# Altium PCB electrodes_interface_pcb.PcbDoc (part 3 of 4)
Units mm, origin at the board's own origin, x right, y up, seen from the top; angles counter-clockwise.
Board outline 433.27 x 43.31 mm, 4 copper layers (Top Layer, Signal Layer 1, Signal Layer 2, Bottom Layer), stack 1.308 mm thick; 42 components, 52 nets, 166 pads, 143 vias.
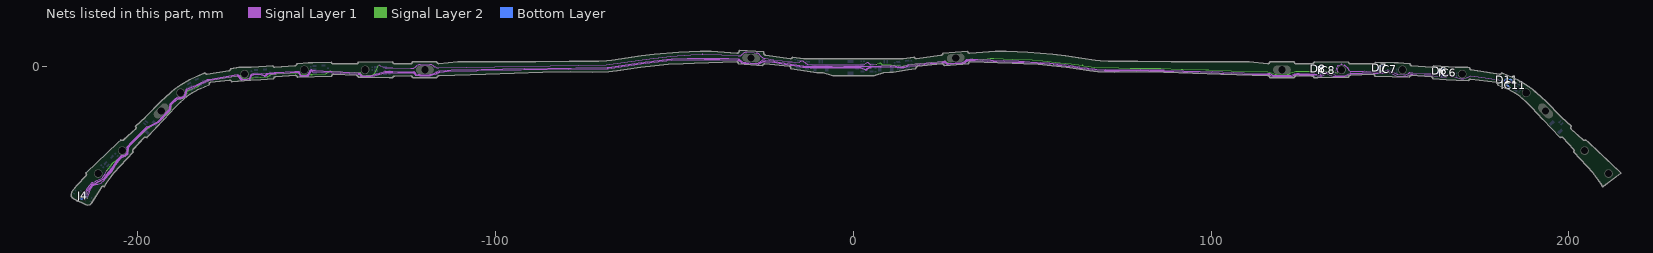
[diagram p5: the nets of this part, all layers, seen from the top]

## Via types
v1: diameter 0.4, hole 0.2, Top Layer to Bottom Layer, tented both sides, 143 vias

## Nets (pads, with @x,y where several pads share a name; then routed paths per layer and width w, separated by ;. In a path a pad name is that pad's centre, name@x,y a point inside that pad or via, vN(x,y) a via of type N, cw(c..) or ccw(c..) an arc to the next point about the centre after c; other vN are vias at no path point) (continued)
ADC_TR1: D11.2 IC11.4 IC11.5 J4.8 | length 432.3
  Signal Layer 1 w0.075: -122.272,0.134 -122.009,0.343 cw(c-121.098,-0.801) -121.098,0.661 -118.498,0.661 cw(c-118.498,-1.083) -117.208,0.09 cw(c-118.498,-1.083) -117.207,0.089 -117.206,0.088 -117.184,0.065 -117.152,0.065 ccw(c-117.152,0.14) -117.151,0.065 -116.955,0.072
  Signal Layer 1 w0.1: v1(-215.755,-35.899) -215.582,-35.58 -215.546,-35.544 -215.362,-35.42 -214.895,-34.953 -214.512,-34.455 -213.974,-33.75 -212.839,-32.286 -212.65,-32.232 cw(c-212.486,-32.809) -212.62,-32.224 -212.164,-32.119 ccw(c-212.187,-32.021) -212.161,-32.118 ; -212.171,-32.124 -212.161,-32.118 ; -212.115,-32.091 cw(c-212.187,-32.021) -212.12,-32.096 ; v1(-208.675,-29.043) -209.215,-29.811 -209.817,-30.859 -209.9,-30.909 cw(c-209.991,-30.759) -209.91,-30.915 -211.386,-31.704 -212.12,-32.096 ; v1(-132.683,0.62) -132.22,0.411 cw(c-132.364,0.092) -132.208,0.406 -130.827,-0.279 ccw(c-130.782,-0.189) -130.797,-0.288 -130.79,-0.289 ; -130.789,-0.289 -130.788,-0.289 -130.78,-0.289 -130.019,-0.28 -129.134,-0.283 -128.726,-0.285 -123.675,-0.305 -123.381,-0.306 -123.3,-0.306 -122.903,-0.306 -122.313,0.092 -122.272,0.134 ; -116.946,0.058 -116.489,-0.207 -116.461,-0.207 -116.4,-0.207 -115.932,-0.206 -69.113,0.64 -69.044,0.642 -55.904,2.435 -54.505,2.625 -54.427,2.635 -51.029,3.027 -45.461,3.418 -42.221,3.528 cw(c-42.189,2.604) -42.168,3.529 -36.751,3.41 -32.208,3.167 -32.052,3.158 -31.717,3.14 -31.595,3.139 ccw(c-31.595,3.239) -31.523,3.169 -30.886,3.729 cw(c-29.896,2.602) -29.778,4.097 -27.677,3.932 -27.186,3.893 cw(c-27.304,2.398) -25.935,3.012 ccw(c-25.844,3.052) -25.906,2.974 ; -25.906,2.974 -25.402,2.572 ; -25.406,2.577 ccw(c-25.336,2.649) -25.354,2.55 -25.283,2.537 -24.997,2.485 -24.795,2.448 -24.704,2.435 -22.244,2.078 cw(c-22.33,1.484) -22.234,2.076 -19.884,1.702 -18.31,1.452 ccw(c-18.295,1.55) -18.3,1.451 -17.485,1.414 -17.08,1.396 -15.158,1.309 ccw(c-15.154,1.409) -15.106,1.322 -14.657,1.57 cw(c-14.391,1.089) -14.086,1.547 -12.866,0.736 -11.528,0.675 ccw(c-11.524,0.775) -11.524,0.675 -9.664,0.675 cw(c-9.664,0.475) -9.662,0.675 -0.272,0.619 2.686,0.612 ; 2.687,0.612 ccw(c2.686,0.712) 2.73,0.622 3.754,1.127 ; 3.755,1.127 cw(c3.997,0.633) 4.357,1.05 4.824,0.647 ; 4.824,0.646 ccw(c4.889,0.723) 4.893,0.623 v1(6.454,0.951) ; 135.053,-0.486 v1(135.201,-1.61) ; 135.053,-0.486 cw(c135.152,-0.473) 135.064,-0.426 135.367,0.15 135.458,0.323 ; 135.458,0.323 cw(c135.546,0.276) 135.509,0.369 136.43,0.736 cw(c136.467,0.643) 136.493,0.739 137.255,0.529 ; 137.256,0.529 cw(c137.229,0.433) 137.297,0.506 137.675,0.15 138.135,-0.283 ; 138.135,-0.284 cw(c138.066,-0.356) 138.156,-0.312 138.409,-0.831 138.416,-0.846 138.428,-0.858 138.431,-0.862 138.473,-0.896 138.892,-1.237 138.93,-1.237 138.976,-1.236 142.469,-1.145 142.823,-1.131 ; 142.824,-1.131 cw(c142.827,-1.231) 142.83,-1.131 ; 142.83,-1.131 143.548,-1.148 145.774,-1.113 147.243,-1.09 ; 147.243,-1.09 ccw(c147.241,-0.99) 147.253,-1.089 149.174,-0.852 cw(c149.211,-1.149) 149.207,-0.849 149.279,-0.849 cw(c149.28,-0.949) 149.301,-0.851 149.432,-0.88 149.448,-0.882 cw(c149.337,-1.624) 149.58,-0.914 149.921,-1.031 151.815,-1.891 ; 151.848,-1.9 cw(c151.856,-1.8) 151.816,-1.891 ; 153.814,-2.184 cw(c153.801,-2.085) 153.797,-2.185 152.122,-2.109 cw(c152.125,-2.009) 152.059,-2.084 152.004,-2.035 151.903,-1.945 ccw(c151.77,-2.095) 151.867,-1.92 151.815,-1.891 ; 153.815,-2.184 154.317,-2.117 154.323,-2.117 ; 154.323,-2.117 154.326,-2.117 ccw(c154.36,-1.621) 154.428,-2.114 154.639,-2.035 155.084,-1.87 ccw(c155.05,-1.777) 155.101,-1.862 155.407,-1.678 cw(c155.561,-1.935) 155.463,-1.652 155.471,-1.649 155.63,-1.594 cw(c155.728,-1.878) 155.66,-1.586 cw(c155.728,-1.878) 155.692,-1.58 155.748,-1.573 cw(c155.807,-2.07) 155.865,-1.573 156.434,-1.638 159.538,-1.835 ; 159.538,-1.835 161.643,-1.966 166.166,-2.035 166.731,-2.364 ccw(c166.782,-2.278) 166.753,-2.373 169.433,-3.174 ; 166.166,-2.035 cw(c166.164,-2.135) 166.174,-2.035 cw(c166.164,-2.135) 166.192,-2.039 ; 169.433,-3.174 cw(c169.404,-3.27) 169.435,-3.175 169.788,-3.287 ccw(c170.198,-2.001) 170.683,-3.262 171.37,-2.997 ccw(c171.334,-2.904) 171.386,-2.989 171.602,-2.858 171.611,-2.852 171.621,-2.849 172.048,-2.7 172.595,-2.509 172.618,-2.509 172.623,-2.51 175.605,-2.856 cw(c175.594,-2.955) 175.61,-2.856 180.382,-3.624 181.148,-3.751 183.775,-4.186 ccw(c183.792,-4.087) 183.789,-4.187 183.979,-4.377 v1(184.702,-4.377) ; -212.161,-32.118 ccw(c-212.187,-32.021) -212.12,-32.096 ; -212.161,-32.118 -212.12,-32.096
  Signal Layer 2 w0.075: -173.743,-2.76 -171.53,-2.493 ; -171.529,-2.493 cw(c-171.521,-2.567) -171.462,-2.521 -171.226,-2.818 ccw(c-170.198,-2.001) -169.965,-3.293 -168.317,-3.012 cw(c-168.291,-3.16) -168.303,-3.011 -167.752,-2.969 cw(c-167.746,-3.044) -167.75,-2.969 ccw(c-167.765,-2.657) -167.745,-2.969 -163.802,-2.717 ; -137.473,-2.274 -137.471,-2.275 -137.321,-2.373 ; -137.32,-2.373 ccw(c-137.28,-2.309) -137.281,-2.384 -136.771,-2.394 -136.758,-2.394 -136.068,-2.391 ; -136.067,-2.391 ccw(c-136.068,-2.316) -136.052,-2.389 -135.793,-2.331 cw(c-135.757,-2.49) -135.763,-2.327 -135.105,-2.306
  Signal Layer 2 w0.1: v1(-208.675,-29.043) -207.235,-26.999 cw(c-207.154,-27.057) -207.21,-26.974 -204.903,-25.388 ; -204.895,-25.391 -203.792,-24.963 ccw(c-204.398,-23.401) -202.727,-23.287 -202.798,-22.257 -198.792,-18.608 -197.632,-17.551 -197.628,-17.547 -194.75,-15.518 -194.747,-15.517 -193.479,-14.727 ccw(c-194.417,-13.22) -193.189,-14.502 -190.919,-12.326 -190.826,-12.08 ccw(c-192.016,-11.63) -190.778,-11.922 -190.765,-11.869 -190.75,-11.796 -190.688,-11.276 -190.667,-10.26 ; -190.667,-10.259 cw(c-190.567,-10.262) -190.639,-10.192 -190.556,-10.107 -188.777,-8.867 -188.061,-8.851 -188.058,-8.851 ccw(c-188.098,-7.201) -186.534,-7.727 -186.455,-7.491 cw(c-186.147,-7.595) -186.365,-7.353 -186.338,-7.329 ccw(c-186.405,-7.255) -186.315,-7.297 -186.046,-6.716 ; -186.046,-6.716 cw(c-185.955,-6.758) -185.994,-6.666 -183.28,-5.513 ccw(c-183.32,-5.421) -183.249,-5.492 -182.395,-4.629 cw(c-182.324,-4.7) -182.367,-4.609 -181.006,-3.956 -180.577,-3.75 cw(c-180.534,-3.84) -180.551,-3.742 -177.893,-3.271 ; -177.893,-3.271 cw(c-177.876,-3.369) -177.889,-3.27 -175.296,-2.915 cw(c-175.283,-3.014) -175.293,-2.914 -173.743,-2.76 ; -163.798,-2.734 ccw(c-163.806,-2.634) -163.75,-2.717 -162.804,-2.078 cw(c-162.524,-2.492) -162.548,-1.993 -162.459,-1.988 -161.973,-1.963 -161.209,-1.916 -158.962,-1.776 cw(c-158.949,-1.976) -158.958,-1.776 -155.861,-1.647 -155.661,-1.639 -155.248,-1.618 cw(c-155.223,-2.117) -154.862,-1.771 -154.632,-2.01 -154.463,-2.186 ; -154.463,-2.186 ccw(c-154.391,-2.117) -154.388,-2.217 -152.745,-2.164 -151.762,-2.103 ccw(c-151.536,-1.601) -151.689,-2.13 -151.35,-2.119 ccw(c-151.536,-1.601) -151.25,-2.071 -147.552,-1.842 ccw(c-147.558,-1.742) -147.513,-1.832 -147.512,-1.831 -146.373,-1.259 cw(c-146.149,-1.705) -146.124,-1.206 cw(c-146.149,-1.705) -146.122,-1.206 -145.774,-1.223 -145.754,-1.224 cw(c-145.774,-1.624) -145.752,-1.224 -140.787,-1.467 -138.474,-1.581 -138.148,-1.597 cw(c-138.17,-2.096) -137.729,-1.862 -137.635,-2.035 -137.588,-2.123 -137.545,-2.204 ; -137.544,-2.204 ccw(c-137.457,-2.156) -137.459,-2.256 ; -135.132,-2.302 -134.948,-2.27 -134.931,-2.266 -134.211,-2.083 ccw(c-134.346,-1.549) -134.088,-2.035 ccw(c-134.346,-1.549) -133.916,-1.893 -133.711,-1.636 -133.698,-1.614 v1(-132.683,0.62) ; v1(6.454,0.951) 7.348,1.069 cw(c7.394,0.722) 7.584,1.016 8.101,0.683 8.153,0.667 10.59,0.596 10.603,0.595 11.073,0.529 11.498,0.517 cw(c11.489,0.217) 11.53,0.514 13.103,0.305 13.651,0.205 13.941,0.205 14.031,0.275 15.419,0.629 cw(c15.493,0.338) 15.465,0.637 17.485,0.832 17.961,0.878 19.764,1.053 24.976,1.573 cw(c24.997,1.374) 24.978,1.573 24.997,1.575 25.454,1.621 cw(c25.484,1.323) 25.615,1.592 26.567,1.131 ; 26.617,1.121 26.567,1.131 ; 26.748,1.013 26.567,1.131 ; 26.748,1.012 ccw(c26.802,1.097) 26.808,0.997 30.28,1.206 ccw(c30.274,1.306) 30.301,1.21 30.599,1.29 cw(c30.625,1.194) 30.618,1.294 ccw(c30.55,2.311) 31.079,1.44 32.012,2.006 cw(c32.167,1.75) 32.147,2.049 32.208,2.054 33.259,2.127 cw(c33.28,1.827) 33.294,2.127 cw(c33.28,1.827) 33.297,2.127 35.666,2 38.249,2.402 cw(c38.295,2.106) 38.298,2.406 38.409,2.405 cw(c38.408,2.305) 38.413,2.405 39.29,2.367 44.598,2.156 49.934,1.944 cw(c49.926,1.744) 49.938,1.944 52.907,1.785 ; 52.908,1.784 cw(c52.892,1.485) 52.927,1.783 57.856,1.192 60.832,0.835 cw(c60.809,0.636) 60.836,0.834 60.838,0.834 60.897,0.826 64.038,0.412 ; 64.039,0.412 cw(c64,0.114) 64.052,0.41 64.417,0.347 64.419,0.347 65.623,0.15 67.349,-0.132 67.364,-0.134 74.11,-0.286 77.44,-0.324 77.442,-0.324 81.258,-0.312 cw(c81.259,-0.612) 81.267,-0.312 85.873,-0.432 91.599,-0.586 92.107,-0.599 cw(c92.103,-0.799) 92.109,-0.599 98.508,-0.776 99.291,-0.8 ; 99.292,-0.8 105.693,-1.002 105.695,-1.002 115.877,-1.335 116.4,-1.513 117.933,-2.035 118.063,-2.079 ccw(c118.498,-0.801) 118.498,-2.151 121.098,-2.151 ccw(c121.098,-0.801) 121.647,-2.035 ccw(c121.098,-0.801) 122.076,-1.732 122.141,-1.667 123.3,-1.375 123.662,-1.261 cw(c123.693,-1.356) 123.692,-1.256 126.334,-1.235 ccw(c126.333,-1.135) 126.336,-1.235 128.505,-1.181 ; 128.506,-1.181 cw(c128.508,-1.281) 128.509,-1.181 128.726,-1.185 128.752,-1.185 132.327,-1.248 ccw(c132.333,-0.898) 132.455,-1.226 cw(c132.49,-1.32) 132.491,-1.22 133.984,-1.224 v1(135.201,-1.61)
  Bottom Layer w0.1: J4.8@-215.966,-36.827 -215.9,-36.692 -215.837,-36.555 -215.827,-36.496 -215.827,-36.252 -215.812,-36.237 -215.812,-35.956 v1(-215.755,-35.899) ; 182.143,-3.685 181.998,-3.962 ccw(c182.131,-4.031) 182.018,-4.13 182.66,-4.862 IC11.4@182.99,-5.341 ; 182.143,-3.684 cw(c182.231,-3.731) 182.15,-3.674 182.233,-3.555 cw(c182.356,-3.642) 182.261,-3.525 182.674,-3.19 D11.2@182.957,-3.151 183.157,-3.254 183.48,-3.441 IC11.5@183.94,-3.696 184.29,-4.139 v1(184.702,-4.377)
ADC_TR2: D6.2 IC6.4 IC6.5 J4.9 | length 409.5
  Signal Layer 1 w0.075: -194.395,-15.163 -191.633,-12.292 ccw(c-192.579,-11.382) -191.322,-11.761 -191.157,-11.213 ; -190.91,-10.122 -190.866,-10.08 -189.455,-8.715 cw(c-189.402,-8.768) -189.437,-8.702 -188.791,-8.358 cw(c-188.755,-8.424) -188.778,-8.353 cw(c-188.755,-8.424) -188.719,-8.358 -188.716,-8.36 ccw(c-188.098,-7.201) -186.815,-7.476 -186.547,-6.225 cw(c-186.474,-6.241) -186.533,-6.195 -186.53,-6.191 ; -172.283,-2.002 -172,-2.14 cw(c-172.033,-2.208) -171.975,-2.16 -171.008,-3.33 -170.969,-3.371 ccw(c-170.914,-3.32) -170.907,-3.395 -169.393,-3.25 ccw(c-169.4,-3.175) -169.388,-3.249 -168.87,-3.163 ccw(c-168.882,-3.089) -168.814,-3.12 -168.318,-2.017 cw(c-168.249,-2.048) -168.278,-1.979 -167.816,-1.787 ; -155.027,-1.159 -154.958,-1.344 ; -154.947,-1.374 -154.929,-1.417 ccw(c-153.498,-0.801) -154.833,-1.604 cw(c-154.961,-1.682) -154.82,-1.631 -154.567,-2.322 -153.211,-2.279 -152.712,-2.262 ccw(c-152.714,-2.187) -152.654,-2.232 -152.522,-2.052 cw(c-152.462,-2.097) -152.519,-2.049 -152.415,-1.922 cw(c-152.241,-2.065) -152.401,-1.907 ccw(c-153.498,-0.801) -152.138,-1.559 ccw(c-153.132,-1.006) -152.137,-1.557 ccw(c-153.498,-0.801) -151.977,-1.134 ; -151.973,-1.134 -151.959,-1.04 ; -151.959,-1.039 cw(c-151.885,-1.05) -151.933,-0.993 -151.846,-0.921 -151.824,-0.903 ; -138.202,-1.628 -137.991,-1.739 cw(c-138.17,-2.082) -137.863,-1.846 -137.862,-1.847 -137.718,-2.035 -137.486,-2.339 ccw(c-137.416,-2.285) -137.43,-2.372 -137.424,-2.372 -135.186,-2.402 ccw(c-135.185,-2.327) -135.165,-2.4 -134.818,-2.303 ; -122.296,-1.86 -122.294,-1.862 -122.292,-1.864 -122.264,-1.892 -121.603,-2.035 -121.376,-2.084 ccw(c-121.098,-0.801) -121.098,-2.114 -118.498,-2.114 ccw(c-118.498,-0.801) -118.05,-2.035 ccw(c-118.498,-0.801) -118.003,-2.017 -116.793,-1.523 ; -32.052,2.298 -31.113,1.447 ; -31.113,1.447 ccw(c-31.063,1.503) -31.083,1.43 -30.811,1.355 ; -30.811,1.355 ccw(c-30.791,1.427) -30.798,1.353 -30.054,1.284 -27.557,1.09 -27.114,1.057 ; -27.114,1.057 ccw(c-27.108,1.132) -27.083,1.061 -26.371,1.311 ; -26.371,1.311 ccw(c-26.396,1.382) -26.355,1.32 -25.466,1.91 -25.464,1.911 cw(c-25.419,1.836) -25.443,1.92 -25.283,1.965 -24.997,2.045 ; 26.246,1.162 26.617,1.033 26.646,1.036 28.436,1.173 cw(c28.442,1.098) 28.438,1.173 28.975,1.196 30.378,1.301 ccw(c30.372,1.376) 30.401,1.307 31.038,1.573
  Signal Layer 1 w0.1: v1(-214.962,-36.19) -214.962,-35.618 -214.594,-35.251 -214.116,-34.626 -213.574,-33.887 -212.636,-32.676 -212.627,-32.667 cw(c-212.486,-32.809) -212.531,-32.614 -211.959,-32.482 ; -211.958,-32.482 ccw(c-211.981,-32.385) -211.909,-32.454 ; -211.899,-32.466 -211.091,-32 -209.728,-31.214 ccw(c-209.991,-30.759) -209.72,-31.209 -209.44,-31.046 ; -209.47,-31.057 -209.186,-30.563 -208.104,-29.266 ccw(c-208.181,-29.202) -208.102,-29.263 -207.225,-28.131 ccw(c-207.304,-28.07) -207.221,-28.126 -205.761,-25.957 -204.649,-24.771 cw(c-204.578,-24.84) -204.648,-24.77 -204.619,-24.74 -204.578,-24.74 -204.571,-24.74 ccw(c-204.398,-23.401) -203.083,-23.098 -203.201,-22.571 ; -203.201,-22.57 cw(c-203.103,-22.549) -203.178,-22.483 -202.895,-22.16 -202.886,-22.15 -201.933,-21.063 -199.115,-18.285 -197.619,-16.81 cw(c-197.058,-17.38) -197.411,-16.662 -194.395,-15.163 ; -191.171,-11.192 cw(c-191.071,-11.2) -191.166,-11.17 -191.166,-10.994 -191.169,-10.991 -191.17,-10.969 -191.183,-10.664 -191.183,-10.62 -191.172,-10.528 -190.893,-10.094 cw(c-190.809,-10.149) -190.873,-10.072 ; -186.512,-6.177 cw(c-186.423,-6.223) -186.463,-6.131 -183.686,-4.95 ccw(c-183.778,-4.734) -183.676,-4.946 -180.599,-3.459 ; -180.598,-3.459 cw(c-180.555,-3.549) -180.572,-3.45 -180.135,-3.374 -172.283,-2.002 ; -167.816,-1.788 -163.112,-1.555 -161.973,-1.499 -161.466,-1.474 ccw(c-161.478,-1.239) -161.462,-1.473 -156.215,-1.144 cw(c-156.209,-1.244) -156.208,-1.144 -155.66,-1.151 -155.027,-1.159 ; -151.821,-0.907 cw(c-151.513,-1.591) -151.519,-0.841 cw(c-151.515,-1.39) -151.311,-0.88 -151.299,-0.885 -151.28,-0.886 ; -151.278,-0.886 -150.39,-0.879 -145.774,-1.148 -139.505,-1.514 -138.474,-1.596 -138.468,-1.596 cw(c-138.482,-1.771) -138.458,-1.598 -138.211,-1.631 ; -134.818,-2.303 -133.861,-2.035 -131.42,-1.352 -131.037,-1.245 cw(c-130.929,-1.63) -130.921,-1.23 -128.726,-1.27 -127.338,-1.295 -123.3,-1.368 -123.296,-1.368 -122.946,-1.374 -122.943,-1.374 cw(c-122.953,-1.874) -122.58,-1.541 -122.579,-1.543 -122.296,-1.86 ; -116.809,-1.519 -116.698,-1.453 cw(c-116.646,-1.539) -116.684,-1.446 -116.4,-1.33 -115.883,-1.119 -115.749,-1.107 ccw(c-115.771,-0.873) -115.747,-1.106 -112.363,-0.763 -104.094,-0.626 -91.964,-0.427 -77.687,-0.193 -68.82,-0.048 -68.62,-0.045 ccw(c-68.625,0.23) -68.586,-0.042 -64.75,0.515 -59.286,1.308 ; -59.286,1.308 cw(c-59.272,1.209) -59.283,1.308 -54.692,1.849 -50.928,2.28 cw(c-50.916,2.18) -50.92,2.28 -46.409,2.435 -44.863,2.488 cw(c-44.86,2.388) -44.859,2.488 -37.199,2.435 -34.894,2.419 -32.208,2.303 -32.202,2.302 -32.201,2.302 -32.052,2.298 ; -24.997,2.045 -24.993,2.046 -24.778,2.024 cw(c-24.788,1.925) -24.774,2.024 -22.302,1.682 cw(c-22.33,1.484) -22.295,1.681 -22.036,1.635 -14.149,0.39 cw(c-14.165,0.291) -14.114,0.377 -14.026,0.325 ccw(c-13.849,0.627) -13.851,0.277 -2.712,0.198 ; -2.712,0.198 -0.162,0.175 ; -0.16,0.175 4.919,0.209 10.762,0.463 13.686,0.112 ccw(c13.752,0.658) 13.947,0.144 15.454,0.713 20.367,1.119 ccw(c20.358,1.219) 20.369,1.12 24.997,1.615 25.238,1.641 ; 25.238,1.641 cw(c25.248,1.542) 25.271,1.639 25.581,1.568 cw(c25.469,1.081) 25.763,1.486 26.163,1.196 ccw(c26.222,1.277) 26.226,1.177 ; 31.04,1.569 ccw(c31.029,1.669) 31.089,1.588 31.614,1.975 cw(c31.91,1.572) 31.849,2.069 32.208,2.113 32.518,2.152 cw(c32.598,1.507) 32.538,2.154 32.548,2.155 cw(c32.612,1.508) 32.57,2.157 32.875,2.176 cw(c32.894,1.877) 32.9,2.177 34.77,2.139 cw(c34.768,2.039) 34.772,2.139 42.004,1.83 46.288,1.753 cw(c46.286,1.653) 46.294,1.753 49.294,1.515 ; 49.294,1.515 ccw(c49.301,1.614) 49.296,1.514 52.307,1.331 54.887,1.166 cw(c54.88,1.066) 54.891,1.165 56.891,0.945 ; 56.892,0.945 57.892,0.826 60.058,0.569 cw(c60.046,0.469) 60.063,0.568 62.114,0.206 63.246,0.072 cw(c63.235,-0.027) 63.25,0.072 67.486,-0.57 ; 67.487,-0.57 ccw(c67.501,-0.471) 67.499,-0.571 73.353,-0.748 80.121,-0.69 ; 80.121,-0.69 cw(c80.122,-0.79) 80.125,-0.69 82.905,-0.773 ccw(c82.908,-0.673) 82.907,-0.773 86.965,-0.8 ; 86.966,-0.8 cw(c86.964,-0.9) 86.968,-0.8 92.377,-1.012 100.297,-1.213 109.274,-1.613 ; 109.275,-1.613 115.851,-1.807 ccw(c115.854,-1.707) 115.858,-1.807 116.344,-1.787 ; 116.344,-1.787 cw(c116.348,-1.887) 116.399,-1.801 ; 116.4,-1.802 116.744,-2.008 ; 116.745,-2.008 ccw(c116.796,-1.922) 116.76,-2.016 116.811,-2.035 117.292,-2.218 117.927,-2.25 ccw(c117.932,-2.15) 117.931,-2.25 122.213,-2.272 ccw(c122.214,-2.172) 122.245,-2.267 122.94,-2.035 123.3,-1.915 123.359,-1.895 ; 123.36,-1.895 cw(c123.391,-1.99) 123.369,-1.893 123.966,-1.757 ; 123.966,-1.756 cw(c123.988,-1.854) 123.994,-1.754 124.704,-1.797 129.019,-1.84 cw(c129.018,-1.94) 129.031,-1.841 130.515,-2.035 130.56,-2.041 ; 130.56,-2.041 ccw(c130.573,-1.942) 130.609,-2.035 ccw(c130.573,-1.942) 130.62,-2.03 131.852,-1.378 cw(c131.899,-1.466) 131.905,-1.366 ; 131.905,-1.366 132.164,-1.381 132.178,-1.382 134.117,-2.035 135.325,-2.442 135.342,-2.442 135.344,-2.442 137.475,-2.389 137.494,-2.38 138.264,-2.035 138.473,-1.941 138.939,-1.732 cw(c138.98,-1.823) 138.972,-1.724 139.198,-1.706 cw(c139.221,-2.005) 139.209,-1.706 142.188,-1.585 147.573,-1.494 ; 147.573,-1.494 ccw(c147.571,-1.394) 147.584,-1.494 149.293,-1.277 cw(c149.337,-1.624) 149.535,-1.335 149.92,-1.598 ccw(c149.977,-1.516) 149.939,-1.608 150.983,-2.034 150.987,-2.035 151.986,-2.539 ; 151.987,-2.539 152.009,-2.54 154.717,-2.627 154.718,-2.627 ccw(c154.72,-2.527) 154.72,-2.627 154.74,-2.627 154.862,-2.577 154.874,-2.571 154.945,-2.53 154.957,-2.523 cw(c155.005,-2.61) 154.958,-2.522 155.471,-2.242 155.85,-2.035 155.937,-1.987 155.968,-1.987 155.974,-1.988 156.389,-2.035 157.531,-2.164 ; 157.531,-2.164 ccw(c157.542,-2.065) 157.538,-2.165 161.926,-2.384 cw(c161.921,-2.484) 161.934,-2.385 162.222,-2.424 164.062,-2.67 v1(165.82,-2.67)
  Bottom Layer w0.1: v1(-214.962,-36.19) -214.928,-35.753 -214.873,-35.406 J4.9@-214.845,-35.253 ; IC6.5@165.024,-0.558 164.499,-0.548 164.189,-0.526 D6.2@163.963,-0.537 163.727,-0.696 163.502,-1.178 ccw(c163.638,-1.241) 163.489,-1.231 163.457,-1.679 ccw(c163.607,-1.69) 163.55,-1.829 164.059,-2.035 164.385,-2.168 IC6.4@164.892,-2.454 165.405,-2.641 v1(165.82,-2.67)
ADC_TR3: D7.2 IC7.4 IC7.5 J4.10 | length 393.3
  Signal Layer 1 w0.075: -190.123,-9.691 -189.337,-8.826 cw(c-189.281,-8.877) -189.304,-8.805 ; -189.303,-8.805 -188.621,-8.599 cw(c-188.599,-8.67) -188.585,-8.597 -188.377,-8.637 ccw(c-188.098,-7.201) -186.678,-7.549 -186.383,-6.343 ; -172.283,-2.205 -172.164,-2.232 cw(c-172.181,-2.305) -172.14,-2.243 -172.125,-2.252 cw(c-172.167,-2.315) -172.104,-2.274 -171.887,-2.607 ccw(c-171.825,-2.566) -171.879,-2.617 -171.021,-3.535 ccw(c-170.966,-3.484) -170.96,-3.559 -168.832,-3.384 ccw(c-168.838,-3.309) -168.793,-3.369 -168.684,-3.288 ccw(c-168.729,-3.228) -168.66,-3.258 -168.658,-3.252 ccw(c-168.726,-3.222) -168.656,-3.249 -168.344,-2.463 cw(c-168.193,-2.523) -168.305,-2.405 ; -168.304,-2.404 -168.126,-2.235 -168.103,-2.213 ; -155.307,-1.341 -155.17,-1.353 cw(c-155.178,-1.44) -155.098,-1.404 -155.067,-1.477 ccw(c-153.498,-0.801) -155.023,-1.57 -154.965,-1.686 cw(c-155.032,-1.719) -154.962,-1.692 ; -154.962,-1.693 -154.707,-2.375 ccw(c-154.567,-2.322) -154.685,-2.415 -154.638,-2.475 -153.2,-2.428 -152.707,-2.412 ccw(c-152.712,-2.262) -152.706,-2.412 -152.629,-2.409 ccw(c-152.632,-2.334) -152.573,-2.38 -152.301,-2.02 cw(c-152.241,-2.065) -152.294,-2.012 ccw(c-153.498,-0.801) -151.872,-1.322 cw(c-151.801,-1.345) -151.87,-1.317 -151.87,-1.315 ; -151.869,-1.315 -151.785,-1.11 ; -138.46,-1.769 -138.115,-1.851 -138.097,-1.856 -138.037,-1.885 -138.025,-1.894 -137.983,-1.936 -137.982,-1.937 -137.907,-2.035 -137.56,-2.487 ccw(c-137.491,-2.434) -137.501,-2.521 -137.497,-2.521 -135.261,-2.564 -135.247,-2.563 -134.794,-2.504 ; -122.407,-2.035 -122.3,-2.12 -121.287,-2.252 ccw(c-121.098,-0.801) -121.098,-2.264 -118.498,-2.264 ccw(c-118.498,-0.801) -118.033,-2.188 -117.578,-2.035 -117.261,-1.929 -117.249,-1.925 ; -32.052,1.977 -31.388,1.445 ; -31.387,1.445 ccw(c-31.341,1.504) -31.381,1.441 -31.326,1.405 cw(c-31.408,1.279) -31.302,1.385 -31.274,1.357 cw(c-31.38,1.251) -31.254,1.331 -31.202,1.25 ; -31.201,1.249 ccw(c-31.138,1.29) -31.144,1.215 -27.296,0.92 -27.167,0.91 -26.693,0.875 -26.526,0.9 ccw(c-26.537,0.974) -26.494,0.913 -25.903,1.332 cw(c-25.809,1.2) -25.864,1.352 -25.627,1.439 cw(c-25.597,1.356) -25.622,1.44 -25.283,1.544 -24.997,1.631 ; 26.224,0.902 26.531,0.864 26.72,0.877 29.773,1.105 31.1,1.205 ccw(c31.095,1.28) 31.148,1.227 31.208,1.287
  Signal Layer 1 w0.1: v1(-214.744,-36.647) -214.021,-35.251 -213.333,-33.922 cw(c-213.244,-33.968) -213.322,-33.905 -212.719,-33.151 -212.532,-32.91 cw(c-212.315,-33.078) -212.374,-32.81 -212.318,-32.797 -211.841,-32.631 ccw(c-211.899,-32.466) -211.811,-32.617 -210.962,-32.128 -209.641,-31.366 -209.639,-31.365 -209.637,-31.364 -209.351,-31.197 ccw(c-209.44,-31.046) -209.337,-31.188 -209.297,-31.159 -209.117,-30.845 -209.102,-30.829 ; -209.101,-30.828 -207.983,-29.61 cw(c-207.91,-29.678) -207.982,-29.609 -207.549,-29.154 -206.671,-27.796 ccw(c-206.755,-27.741) -206.669,-27.792 ; -206.669,-27.792 -206.349,-27.24 cw(c-206.262,-27.29) -206.343,-27.231 -205.474,-26.034 -205.464,-26.024 -204.615,-25.088 cw(c-204.541,-25.155) -204.568,-25.059 -203.98,-24.894 ; -203.979,-24.894 -203.96,-24.888 ccw(c-203.987,-24.792) -203.942,-24.881 -203.474,-24.644 ccw(c-203.52,-24.555) -203.459,-24.634 -203.19,-24.43 -203.185,-24.426 -203.017,-24.222 -203.011,-24.202 -202.904,-23.813 ccw(c-204.398,-23.401) -202.879,-23.095 -202.971,-22.638 ; -202.971,-22.638 cw(c-202.873,-22.619) -202.949,-22.554 -202.743,-22.312 -202.012,-21.455 -198.963,-18.437 -197.514,-16.987 -197.481,-16.954 cw(c-197.058,-17.38) -197.323,-16.842 -194.29,-15.334 ccw(c-194.334,-15.244) -194.261,-15.313 -191.506,-12.394 ccw(c-192.579,-11.382) -191.399,-12.267 -191.319,-12.161 cw(c-191.239,-12.22) -191.317,-12.158 ccw(c-192.542,-11.208) -191.032,-11.56 -191.011,-11.467 ccw(c-192.637,-11.087) -190.979,-11.286 -190.968,-11.194 ccw(c-191.166,-11.17) -190.966,-11.17 -190.966,-10.994 ccw(c-191.166,-10.994) -190.971,-10.95 -190.977,-10.808 -190.881,-10.46 ; -190.881,-10.459 cw(c-190.784,-10.486) -190.854,-10.415 -190.69,-10.254 -190.094,-9.672 ; -186.367,-6.335 cw(c-186.277,-6.378) -186.316,-6.286 -183.608,-5.134 ccw(c-183.778,-4.734) -183.592,-5.127 -183.591,-5.127 -180.331,-3.615 cw(c-180.289,-3.705) -180.306,-3.607 -180.135,-3.577 -172.283,-2.205 ; -168.099,-2.218 -167.774,-2 cw(c-167.718,-2.083) -167.723,-1.983 -165.581,-1.879 ; -165.58,-1.879 cw(c-165.577,-1.979) -165.531,-1.89 -164.706,-2.309 ccw(c-164.548,-1.996) -164.306,-2.249 -163.828,-1.791 -161.973,-1.699 -161.456,-1.673 ccw(c-161.478,-1.239) -161.451,-1.673 -156.832,-1.383 ; -156.832,-1.383 cw(c-156.827,-1.47) -156.83,-1.383 -155.666,-1.346 cw(c-155.66,-1.521) -155.663,-1.346 -155.662,-1.346 -155.318,-1.339 ; -151.774,-1.103 -151.728,-1.085 cw(c-151.537,-1.574) -151.458,-1.055 -151.261,-1.085 -150.695,-1.081 -145.774,-1.36 -138.474,-1.773 ; -134.794,-2.504 -133.119,-2.035 -130.983,-1.437 cw(c-130.929,-1.63) -130.926,-1.43 -128.726,-1.47 -123.3,-1.568 -123.298,-1.568 -122.948,-1.574 -122.947,-1.574 cw(c-122.953,-1.874) -122.729,-1.675 ; -122.728,-1.675 -122.407,-2.035 ; -117.251,-1.926 -117.249,-1.925 -116.58,-1.65 -116.418,-1.635 -115.998,-1.489 -115.749,-1.32 cw(c-115.693,-1.402) -115.703,-1.303 -112.621,-0.99 -104.872,-0.838 -92.211,-0.631 -78.863,-0.413 -70.732,-0.28 -68.816,-0.248 -68.616,-0.245 ccw(c-68.625,0.23) -68.557,-0.24 -65.663,0.18 -58.616,1.185 ; -58.615,1.185 cw(c-58.602,1.086) -58.613,1.186 -52.009,1.955 ; -52.008,1.955 cw(c-51.997,1.855) -52.007,1.955 -50.503,2.094 ; -50.502,2.094 cw(c-50.493,1.995) -50.495,2.095 ; -50.495,2.095 -39.452,2.25 ; -39.45,2.25 -36.048,2.227 -32.208,2.102 -32.052,1.977 ; -24.997,1.631 -24.643,1.739 -22.316,1.489 ; -22.33,1.484 -22.071,1.438 ccw(c-22.036,1.635) -22.068,1.438 -17.485,0.676 -17.357,0.655 ; -17.355,0.655 -17.08,0.612 -14.172,0.166 ; -14.171,0.166 cw(c-14.187,0.068) -14.145,0.158 -14.079,0.128 ccw(c-13.849,0.627) -13.87,0.078 -12.104,0.01 ccw(c-12.1,0.11) -12.099,0.01 -5.907,0.02 -0.163,-0.025 ccw(c-0.161,0.175) -0.161,-0.025 1.975,-0.031 ; 1.975,-0.031 cw(c1.975,-0.131) 2.014,-0.039 3.358,-0.606 cw(c3.32,-0.698) 3.371,-0.612 3.373,-0.613 ccw(c3.546,-0.309) 3.787,-0.563 4.356,-0.022 cw(c4.425,-0.094) 4.424,0.006 4.768,0.008 4.921,0.009 ccw(c4.919,0.209) 4.928,0.009 10.29,0.242 10.61,0.256 cw(c10.614,0.156) 10.626,0.255 13.668,-0.087 ccw(c13.752,0.658) 14.017,-0.043 15.381,0.471 17.363,0.599 ccw(c17.356,0.699) 17.366,0.599 17.485,0.611 18.457,0.709 19.909,0.854 21.526,1.015 22.352,1.09 24.702,1.351 cw(c24.724,1.152) 24.705,1.351 24.997,1.381 25.192,1.401 cw(c25.202,1.301) 25.209,1.401 25.491,1.38 cw(c25.469,1.081) 25.66,1.312 25.839,1.165 ccw(c25.903,1.242) 25.842,1.162 26.14,0.939 ; 26.141,0.938 ccw(c26.2,1.019) 26.207,0.919 ; 31.184,1.311 31.233,1.356 31.707,1.793 cw(c31.91,1.572) 31.873,1.87 32.208,1.912 32.543,1.953 cw(c32.598,1.507) 32.556,1.955 32.569,1.956 cw(c32.612,1.508) 32.583,1.957 32.887,1.977 cw(c32.894,1.877) 32.898,1.977 45.186,1.509 47.596,1.4 cw(c47.576,0.95) 47.601,1.4 cw(c47.579,0.95) 47.606,1.399 53.312,1.059 cw(c53.294,0.759) 53.326,1.058 55.827,0.826 55.909,0.818 ; 55.91,0.818 cw(c55.9,0.719) 55.912,0.818 59.529,0.397 cw(c59.478,-0.05) 59.535,0.397 59.541,0.396 cw(c59.485,-0.051) 59.554,0.394 61.156,0.15 62.473,-0.051 62.719,-0.088 63.324,-0.18 cw(c63.256,-0.625) 63.331,-0.181 cw(c63.26,-0.626) 63.338,-0.183 64.739,-0.428 ccw(c64.756,-0.33) 64.743,-0.429 67.965,-0.841 ccw(c67.978,-0.742) 67.973,-0.842 70.17,-0.932 ; 70.17,-0.932 ccw(c70.174,-0.832) 70.173,-0.932 73.574,-0.949 79.214,-0.919 cw(c79.219,-1.369) 79.221,-0.919 cw(c79.221,-1.369) 79.229,-0.919 82.575,-0.974 85.844,-1.015 cw(c85.842,-1.115) 85.846,-1.015 86.613,-1.04 86.858,-1.044 cw(c86.85,-1.494) 86.866,-1.044 96.947,-1.384 99.976,-1.498 102.264,-1.585 109.013,-1.839 115.793,-2.009 116.153,-2.008 cw(c116.153,-2.108) 116.199,-2.019 116.23,-2.035 116.4,-2.123 116.423,-2.135 ; 116.424,-2.136 ccw(c116.469,-2.046) 116.436,-2.141 117.138,-2.386 ; 117.14,-2.386 117.431,-2.492 ; 117.431,-2.492 ccw(c117.465,-2.398) 117.464,-2.498 119.356,-2.517 121.498,-2.535 122.378,-2.54 ccw(c122.378,-2.44) 122.416,-2.532 123.3,-2.169 123.395,-2.129 cw(c123.567,-2.545) 123.436,-2.115 123.583,-2.071 cw(c123.713,-2.501) 123.675,-2.053 123.751,-2.046 cw(c123.789,-2.495) 123.789,-2.045 cw(c123.791,-2.495) 123.797,-2.045 124.966,-2.057 129.05,-2.077 cw(c129.05,-2.178) 129.064,-2.079 130.676,-2.31 ccw(c130.69,-2.211) 130.741,-2.298 131.189,-2.035 131.713,-1.729 131.737,-1.715 131.81,-1.706 131.907,-1.609 132.197,-1.609 132.402,-1.814 132.402,-1.926 132.446,-1.97 132.616,-2.035 134.165,-2.629 134.182,-2.636 137.378,-2.659 137.398,-2.659 137.416,-2.652 138.473,-2.209 138.891,-2.035 139.182,-1.913 ; 139.183,-1.913 cw(c139.221,-2.005) 139.22,-1.905 144.268,-1.837 ccw(c144.266,-1.737) 144.272,-1.836 145.271,-1.785 cw(c145.284,-2.035) 145.279,-1.785 145.774,-1.777 146.484,-1.764 cw(c146.485,-1.864) 146.486,-1.764 148.938,-1.786 ; 148.939,-1.786 ccw(c148.939,-1.686) 148.979,-1.777 v1(149.337,-1.624)
  Bottom Layer w0.1: J4.10@-215.648,-36.975 -215.603,-36.837 -215.557,-36.791 -215.39,-36.753 v1(-214.744,-36.647) ; IC7.4@148.248,-1.487 148.242,-1.483 148.162,-1.442 148.152,-1.437 147.046,-1.127 cw(c147.154,-0.743) 146.755,-0.73 146.777,-0.085 146.811,-0.052 146.817,-0.047 147.079,0.142 147.09,0.15 147.31,0.309 147.537,0.367 147.787,0.358 IC7.5@148.315,0.412 ; IC7.4@148.248,-1.487 148.663,-1.6 v1(149.337,-1.624)
ADC_TR4: D8.2 IC8.4 IC8.5 J4.11 | length 375.6
  Signal Layer 1 w0.075: -172.283,-2.408 -171.08,-3.692 ; -171.08,-3.692 ccw(c-171.025,-3.641) -171.02,-3.716 -168.654,-3.52 ccw(c-168.66,-3.445) -168.591,-3.475 -168.171,-2.515 ; -155.229,-1.572 -155.221,-1.589 -154.841,-2.444 ccw(c-154.567,-2.322) -154.803,-2.507 -154.756,-2.568 ccw(c-154.638,-2.475) -154.726,-2.596 -154.684,-2.626 -152.466,-2.555 -151.984,-1.878 ccw(c-153.498,-0.801) -151.78,-1.506 -151.765,-1.471 cw(c-151.476,-1.59) -151.759,-1.456 -151.681,-1.292 ; -138.096,-2.035 -137.658,-2.638 ccw(c-137.597,-2.594) -137.599,-2.669 -135.064,-2.718 ccw(c-135.063,-2.643) -135.06,-2.717 -134.769,-2.705 ; -122.504,-2.253 ccw(c-122.446,-2.206) -122.454,-2.28 -121.267,-2.405 ccw(c-121.098,-0.801) -121.257,-2.406 ccw(c-121.098,-0.801) -121.247,-2.407 ccw(c-121.098,-0.801) -121.205,-2.41 ccw(c-121.098,-0.801) -121.098,-2.414 -118.498,-2.414 ccw(c-118.498,-0.801) -118.047,-2.35 -116.968,-2.035 -116.933,-2.025 ; -32.052,1.699 -31.408,1.279 -31.38,1.251 -31.352,1.117 -31.331,1.096 -31.305,1.07 -31.268,1.067 -26.537,0.713 -26.534,0.713 -26.503,0.713 -26.497,0.722 ; 26.061,0.693 26.177,0.686 ; 26.178,0.686 ccw(c26.181,0.761) 26.186,0.686 26.49,0.709 28.05,0.826 30.119,0.981 31.221,1.063 ; 31.221,1.063 ccw(c31.215,1.138) 31.264,1.082 31.312,1.124
  Signal Layer 1 w0.1: v1(-214.246,-36.684) -213.668,-35.251 -213.174,-34.024 -212.58,-33.258 -212.394,-33.017 cw(c-212.315,-33.078) -212.336,-32.98 -212.015,-32.909 ccw(c-212.081,-32.616) -212.007,-32.907 ccw(c-212.081,-32.616) -212.006,-32.907 -211.882,-32.875 ccw(c-212.016,-32.345) -211.761,-32.829 cw(c-211.715,-32.918) -211.716,-32.818 ccw(c-211.741,-29.999) -210.541,-32.55 ccw(c-211.741,-29.999) -209.748,-31.992 -209.372,-31.617 ccw(c-209.443,-31.547) -209.366,-31.61 ccw(c-211.537,-29.856) -209.33,-31.564 cw(c-209.247,-31.62) -209.329,-31.563 -209.252,-31.449 cw(c-209.169,-31.505) -209.25,-31.445 -209.129,-31.283 ; -209.124,-31.258 -209.052,-31.134 -208.033,-30.045 ccw(c-208.106,-29.976) -208.03,-30.041 -207.396,-29.282 ccw(c-207.549,-29.154) -207.381,-29.262 -206.503,-27.904 ; -206.503,-27.903 -206.435,-27.798 cw(c-206.351,-27.852) -206.432,-27.794 -205.208,-26.089 -205.195,-26.073 -204.607,-25.389 cw(c-204.531,-25.455) -204.581,-25.368 -204.258,-25.181 ; -204.238,-25.185 cw(c-204.17,-25.259) -204.197,-25.163 -203.926,-25.086 ccw(c-204.398,-23.401) -203.371,-24.818 -203.006,-24.553 -203.001,-24.55 -202.751,-24.247 -202.666,-23.648 ccw(c-204.398,-23.401) -202.683,-23.055 -202.741,-22.769 ; -202.741,-22.769 cw(c-202.643,-22.749) -202.722,-22.688 -202.568,-22.487 -202.036,-21.792 -198.822,-18.578 -197.373,-17.129 -197.34,-17.096 cw(c-197.058,-17.38) -197.235,-17.021 -194.168,-15.497 ccw(c-194.213,-15.407) -194.14,-15.476 -191.227,-12.371 -191.148,-12.265 ccw(c-192.542,-11.208) -190.837,-11.606 -190.816,-11.513 -190.78,-11.31 ; -190.78,-11.309 -190.769,-11.217 ccw(c-191.166,-11.17) -190.766,-11.17 -190.766,-11.082 -190.738,-10.707 ; -190.737,-10.706 cw(c-190.638,-10.714) -190.713,-10.648 ; -190.713,-10.648 -190.517,-10.427 -190.13,-9.988 ; -190.186,-10.033 -190.13,-9.988 ; -190.116,-9.973 -190.13,-9.988 ; -186.257,-6.581 -186.526,-7.611 cw(c-188.098,-7.201) -188.098,-8.826 -188.619,-8.827 ccw(c-188.619,-8.927) -188.681,-8.848 -190.13,-9.988 ; -186.257,-6.58 cw(c-186.164,-6.615) -186.206,-6.525 -184.562,-5.757 -183.529,-5.318 ccw(c-183.778,-4.734) -183.511,-5.31 -180.271,-3.807 cw(c-180.229,-3.898) -180.245,-3.799 -180.237,-3.798 -180.135,-3.78 -178.987,-3.58 -178.05,-3.416 -172.283,-2.408 ; -168.193,-2.523 -167.708,-2.197 cw(c-167.653,-2.28) -167.657,-2.181 -165.976,-2.098 cw(c-165.971,-2.198) -165.938,-2.104 -164.725,-2.517 ccw(c-164.548,-1.996) -164.166,-2.393 -163.929,-2.165 -163.771,-2.013 cw(c-163.702,-2.086) -163.706,-1.986 -161.973,-1.899 -161.447,-1.873 ccw(c-161.478,-1.239) -161.437,-1.873 -159.187,-1.731 -155.661,-1.547 -155.248,-1.573 ; -151.685,-1.294 -151.681,-1.292 -151.642,-1.269 cw(c-151.592,-1.356) -151.615,-1.259 cw(c-151.537,-1.574) -151.475,-1.255 -151.329,-1.284 ccw(c-151.309,-1.186) -151.309,-1.286 ; -151.309,-1.286 -151.279,-1.286 cw(c-151.279,-1.373) -151.274,-1.286 -145.774,-1.583 -138.474,-1.978 -138.118,-2.031 ; -134.769,-2.705 -132.377,-2.035 -130.929,-1.63 -122.952,-1.774 ; -122.951,-1.774 cw(c-122.955,-1.874) -122.934,-1.776 -122.932,-1.777 cw(c-122.953,-1.875) -122.878,-1.808 -122.679,-2.031 ; -122.68,-2.032 -122.677,-2.035 -122.504,-2.252 ; -116.933,-2.025 -116.648,-1.953 ccw(c-116.679,-1.858) -116.636,-1.948 -116.4,-1.835 ccw(c-116.418,-1.635) -116.352,-1.824 -115.933,-1.678 ccw(c-115.998,-1.489) -115.886,-1.655 -115.678,-1.514 cw(c-115.622,-1.596) -115.632,-1.497 -113.057,-1.235 -105.23,-1.046 -92.918,-0.843 -79.687,-0.626 -68.813,-0.448 -68.613,-0.445 ccw(c-68.625,0.23) -68.529,-0.438 -59.255,0.892 ; -59.255,0.892 cw(c-59.241,0.793) -59.253,0.892 ; -59.253,0.892 -50.918,1.855 ; -50.917,1.855 cw(c-50.906,1.756) -50.908,1.856 -41.683,2.019 ; -41.681,2.019 -37.308,2.035 -32.395,1.905 -32.366,1.904 -32.208,1.801 -32.052,1.699 ; -26.497,0.722 -26.481,0.722 -26.458,0.739 ; -26.457,0.739 -25.838,1.175 cw(c-25.781,1.093) -25.807,1.19 -25.283,1.337 -24.997,1.417 -24.686,1.504 cw(c-24.659,1.408) -24.663,1.508 cw(c-24.659,1.408) -24.649,1.507 -22.565,1.312 -21.446,1.124 -17.858,0.535 -17.485,0.473 -17.39,0.458 ccw(c-17.357,0.655) -17.386,0.457 -17.08,0.408 -14.176,-0.052 cw(c-14.192,-0.15) -14.152,-0.059 -14.15,-0.06 ; -14.149,-0.06 ccw(c-14.11,0.032) -14.132,-0.066 -13.896,-0.12 ccw(c-13.874,-0.022) -13.879,-0.122 ; -13.878,-0.122 -12.112,-0.19 ccw(c-12.1,0.11) -12.1,-0.19 -9.386,-0.191 ; -9.386,-0.191 -6.142,-0.18 1.875,-0.253 ; 1.875,-0.253 cw(c1.873,-0.353) 1.895,-0.256 1.897,-0.256 cw(c1.875,-0.354) 1.91,-0.26 ; 1.911,-0.26 3.345,-0.821 ccw(c3.546,-0.309) 3.925,-0.708 4.465,-0.194 4.922,-0.191 ccw(c4.919,0.209) 4.938,-0.191 9.98,0.028 10.451,0.049 cw(c10.455,-0.051) 10.466,0.048 13.272,-0.25 13.661,-0.287 ccw(c13.752,0.658) 14.088,-0.23 15.192,0.186 17.485,0.371 18.008,0.413 18.179,0.43 18.595,0.473 22.031,0.854 24.724,1.152 cw(c24.735,1.053) 24.732,1.152 24.997,1.163 25.466,1.181 cw(c25.469,1.081) 25.536,1.156 25.91,0.826 26.033,0.718 26.061,0.693 ; 31.31,1.126 31.432,1.246 31.841,1.644 cw(c31.91,1.572) 31.898,1.672 32.208,1.71 32.567,1.755 cw(c32.598,1.507) 32.575,1.756 32.588,1.757 cw(c32.612,1.508) 32.621,1.758 34.082,1.7 37.399,1.569 39.166,1.508 40.129,1.475 44.46,1.325 cw(c44.451,1.075) 44.463,1.325 45.375,1.289 47.586,1.2 cw(c47.576,0.95) 47.589,1.2 47.592,1.2 cw(c47.579,0.95) 47.595,1.2 53.3,0.859 cw(c53.294,0.759) 53.306,0.859 53.612,0.826 54.796,0.7 55.197,0.657 58.084,0.35 59.196,0.232 59.504,0.199 cw(c59.478,-0.05) 59.509,0.198 59.516,0.197 cw(c59.485,-0.051) 59.523,0.197 59.828,0.15 60.413,0.061 61.145,-0.051 62.958,-0.327 63.294,-0.378 cw(c63.256,-0.625) 63.297,-0.378 63.3,-0.379 cw(c63.26,-0.626) 63.303,-0.379 64.707,-0.626 65.722,-0.804 ccw(c65.739,-0.705) 65.728,-0.805 65.792,-0.812 67.708,-1.032 67.71,-1.032 ccw(c67.72,-0.933) 67.715,-1.033 70.277,-1.152 ccw(c70.282,-1.052) 70.281,-1.152 74.358,-1.159 79.217,-1.119 cw(c79.219,-1.369) 79.221,-1.119 cw(c79.221,-1.369) 79.225,-1.119 82.572,-1.174 86.854,-1.244 cw(c86.85,-1.494) 86.86,-1.244 92.19,-1.449 93.51,-1.498 102.517,-1.838 103.485,-1.869 108.893,-2.035 110.938,-2.098 112.312,-2.14 115.565,-2.222 116.037,-2.234 cw(c116.034,-2.334) 116.069,-2.24 116.4,-2.362 117.361,-2.717 ; 117.362,-2.717 ccw(c117.396,-2.623) 117.395,-2.723 122.406,-2.746 ; 122.407,-2.746 ccw(c122.407,-2.646) 122.445,-2.738 123.3,-2.385 123.471,-2.314 cw(c123.567,-2.545) 123.494,-2.306 123.641,-2.262 cw(c123.713,-2.501) 123.692,-2.252 123.767,-2.246 cw(c123.789,-2.495) 123.79,-2.245 cw(c123.791,-2.495) 123.793,-2.245 124.63,-2.254 127.977,-2.287 ; 127.977,-2.287 cw(c127.976,-2.387) 127.986,-2.288 128.022,-2.292 128.215,-2.29 128.222,-2.29 cw(c128.224,-2.54) 128.242,-2.291 128.32,-2.297 cw(c128.302,-2.546) 128.33,-2.297 128.752,-2.344 130.7,-2.56 ccw(c130.711,-2.461) 130.753,-2.551 131.884,-2.035 v1(132.052,-1.959)
  Bottom Layer w0.1: J4.11@-214.528,-35.401 -214.589,-35.538 -214.728,-35.836 -214.728,-35.899 -214.612,-36.045 v1(-214.246,-36.684) ; IC8.5@131.083,0.052 130.558,0.044 130.268,0.044 130.043,0.036 129.818,0.046 129.816,0.046 129.591,0.056 129.589,0.057 129.545,0.057 129.487,-0.002 129.487,-1.333 129.516,-1.363 129.531,-1.378 130.921,-1.903 130.961,-1.903 130.98,-1.894 IC8.4@131.083,-1.848 131.608,-1.959 v1(132.052,-1.959)